# Altium PCB MC0202_V0.90.pcbdoc (part 1 of 3)
Units mm, origin at the board's own origin, x right, y up, seen from the top; angles counter-clockwise.
Board outline 121 x 80 mm, 4 copper layers (Top Layer, Mid-Layer 1, Mid-Layer 2, Bottom Layer); 203 components, 207 nets, 836 pads, 317 vias.
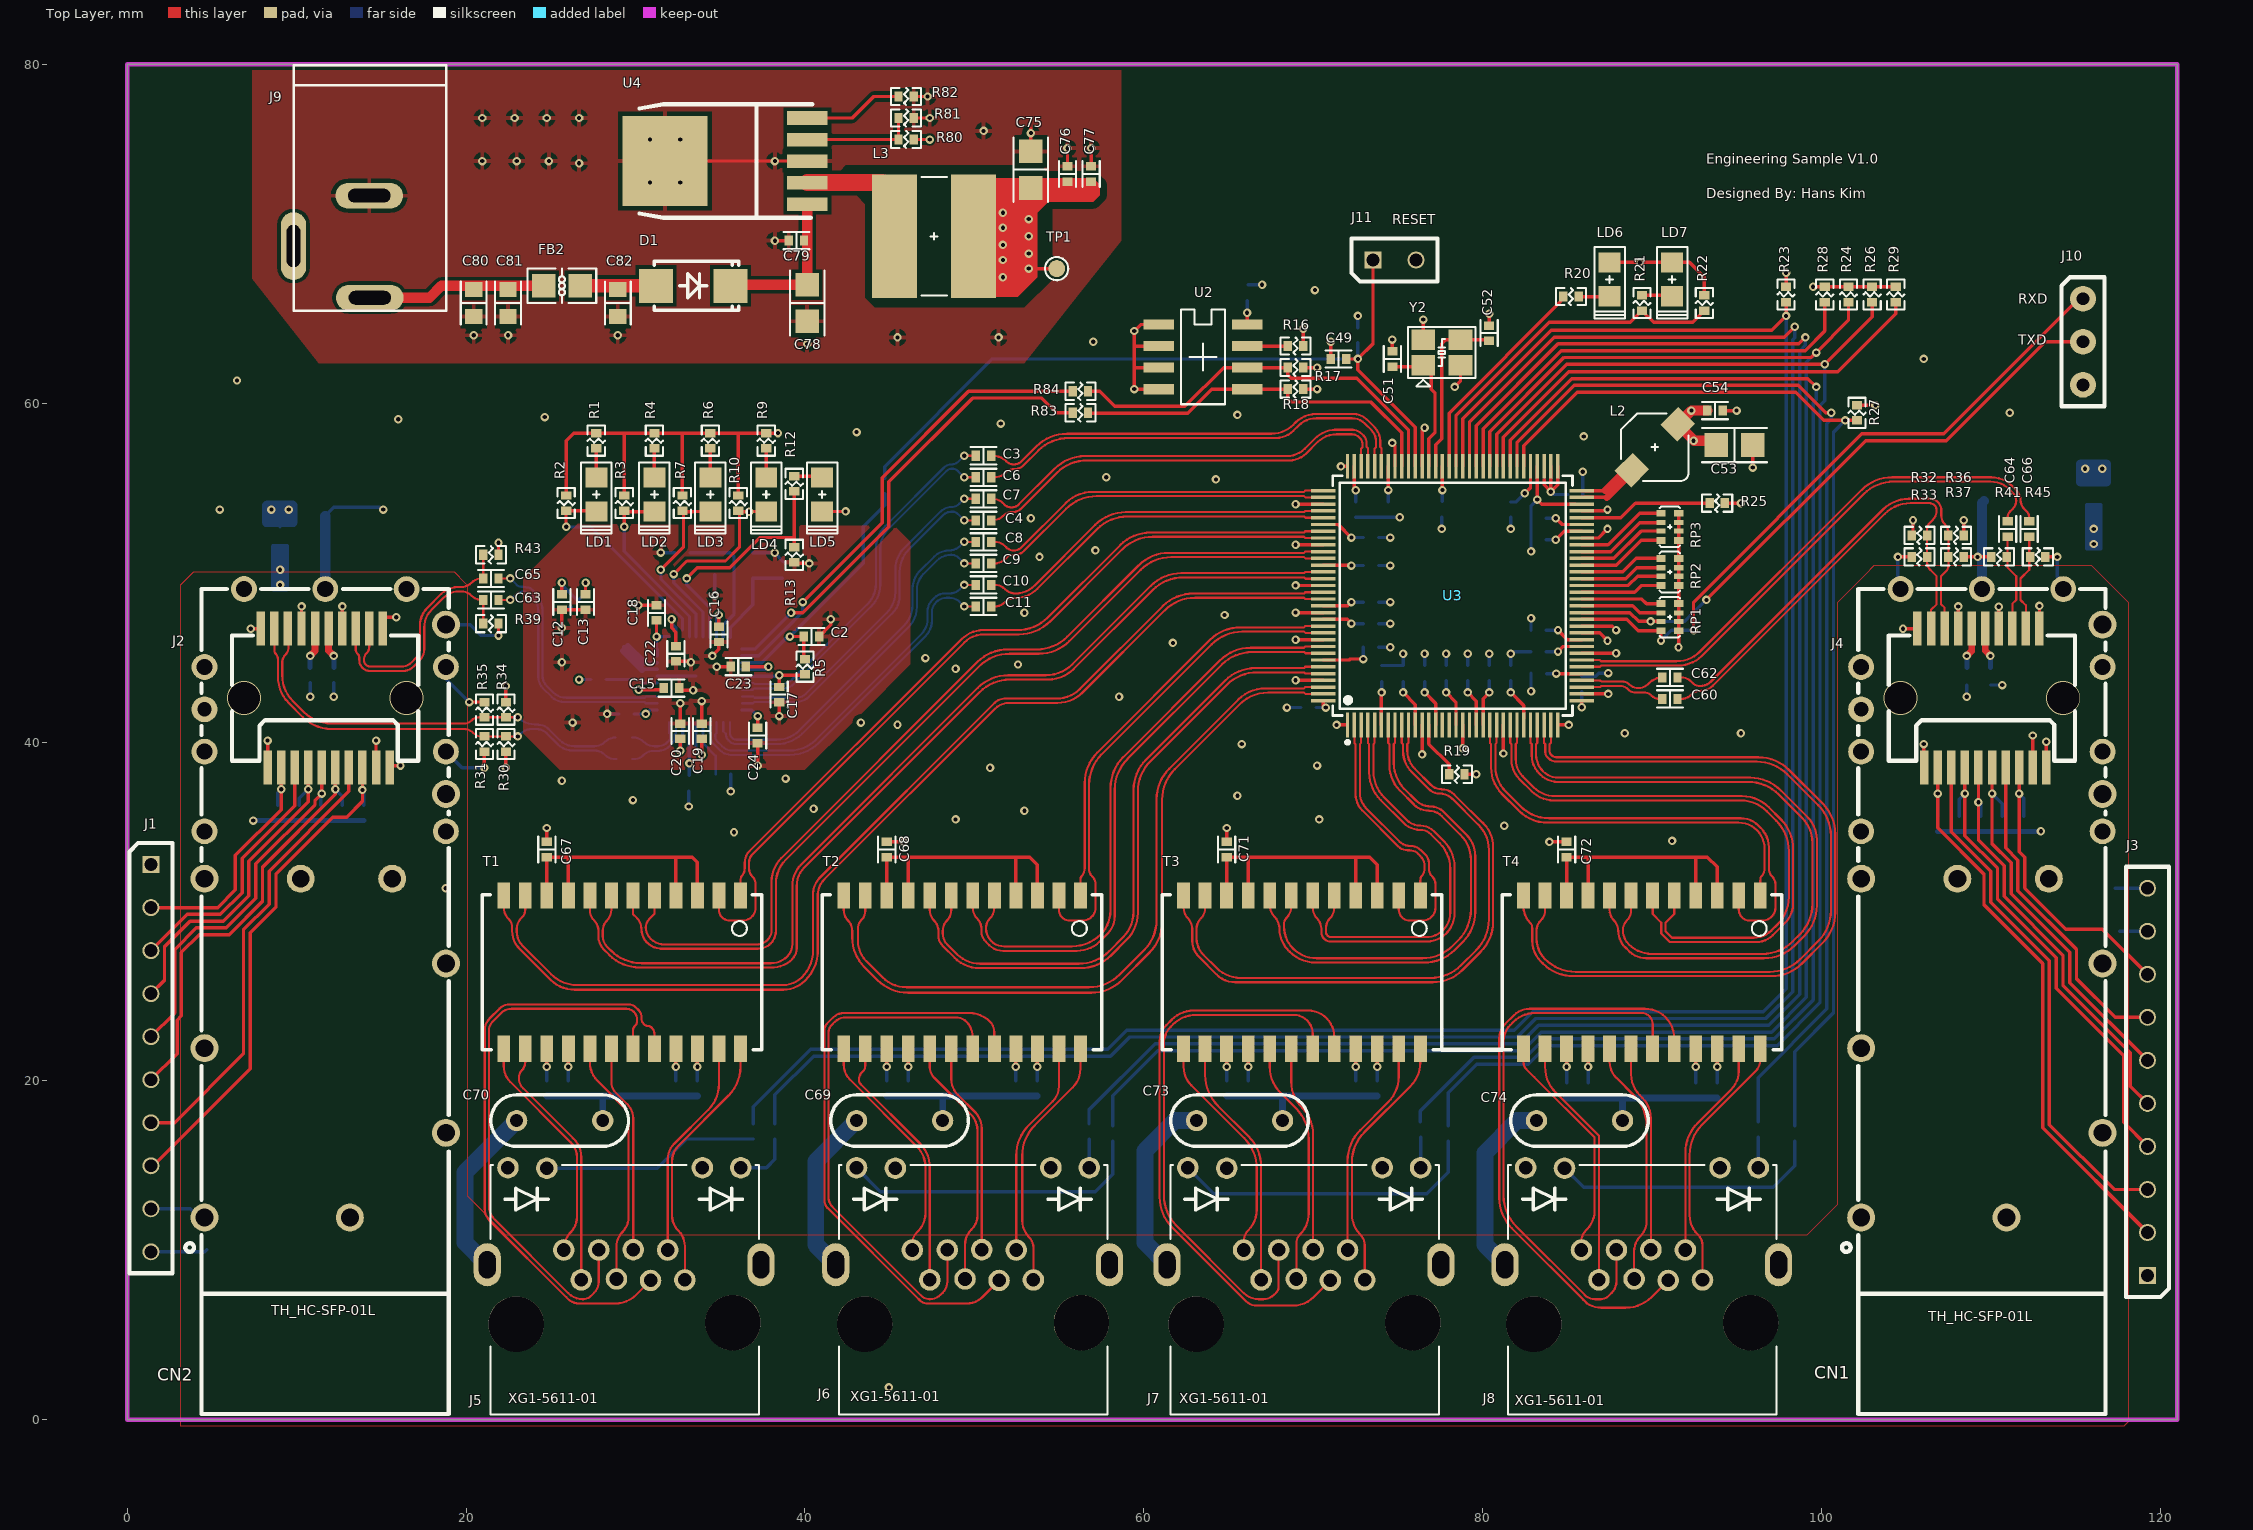
[diagram p0: Top Layer view]
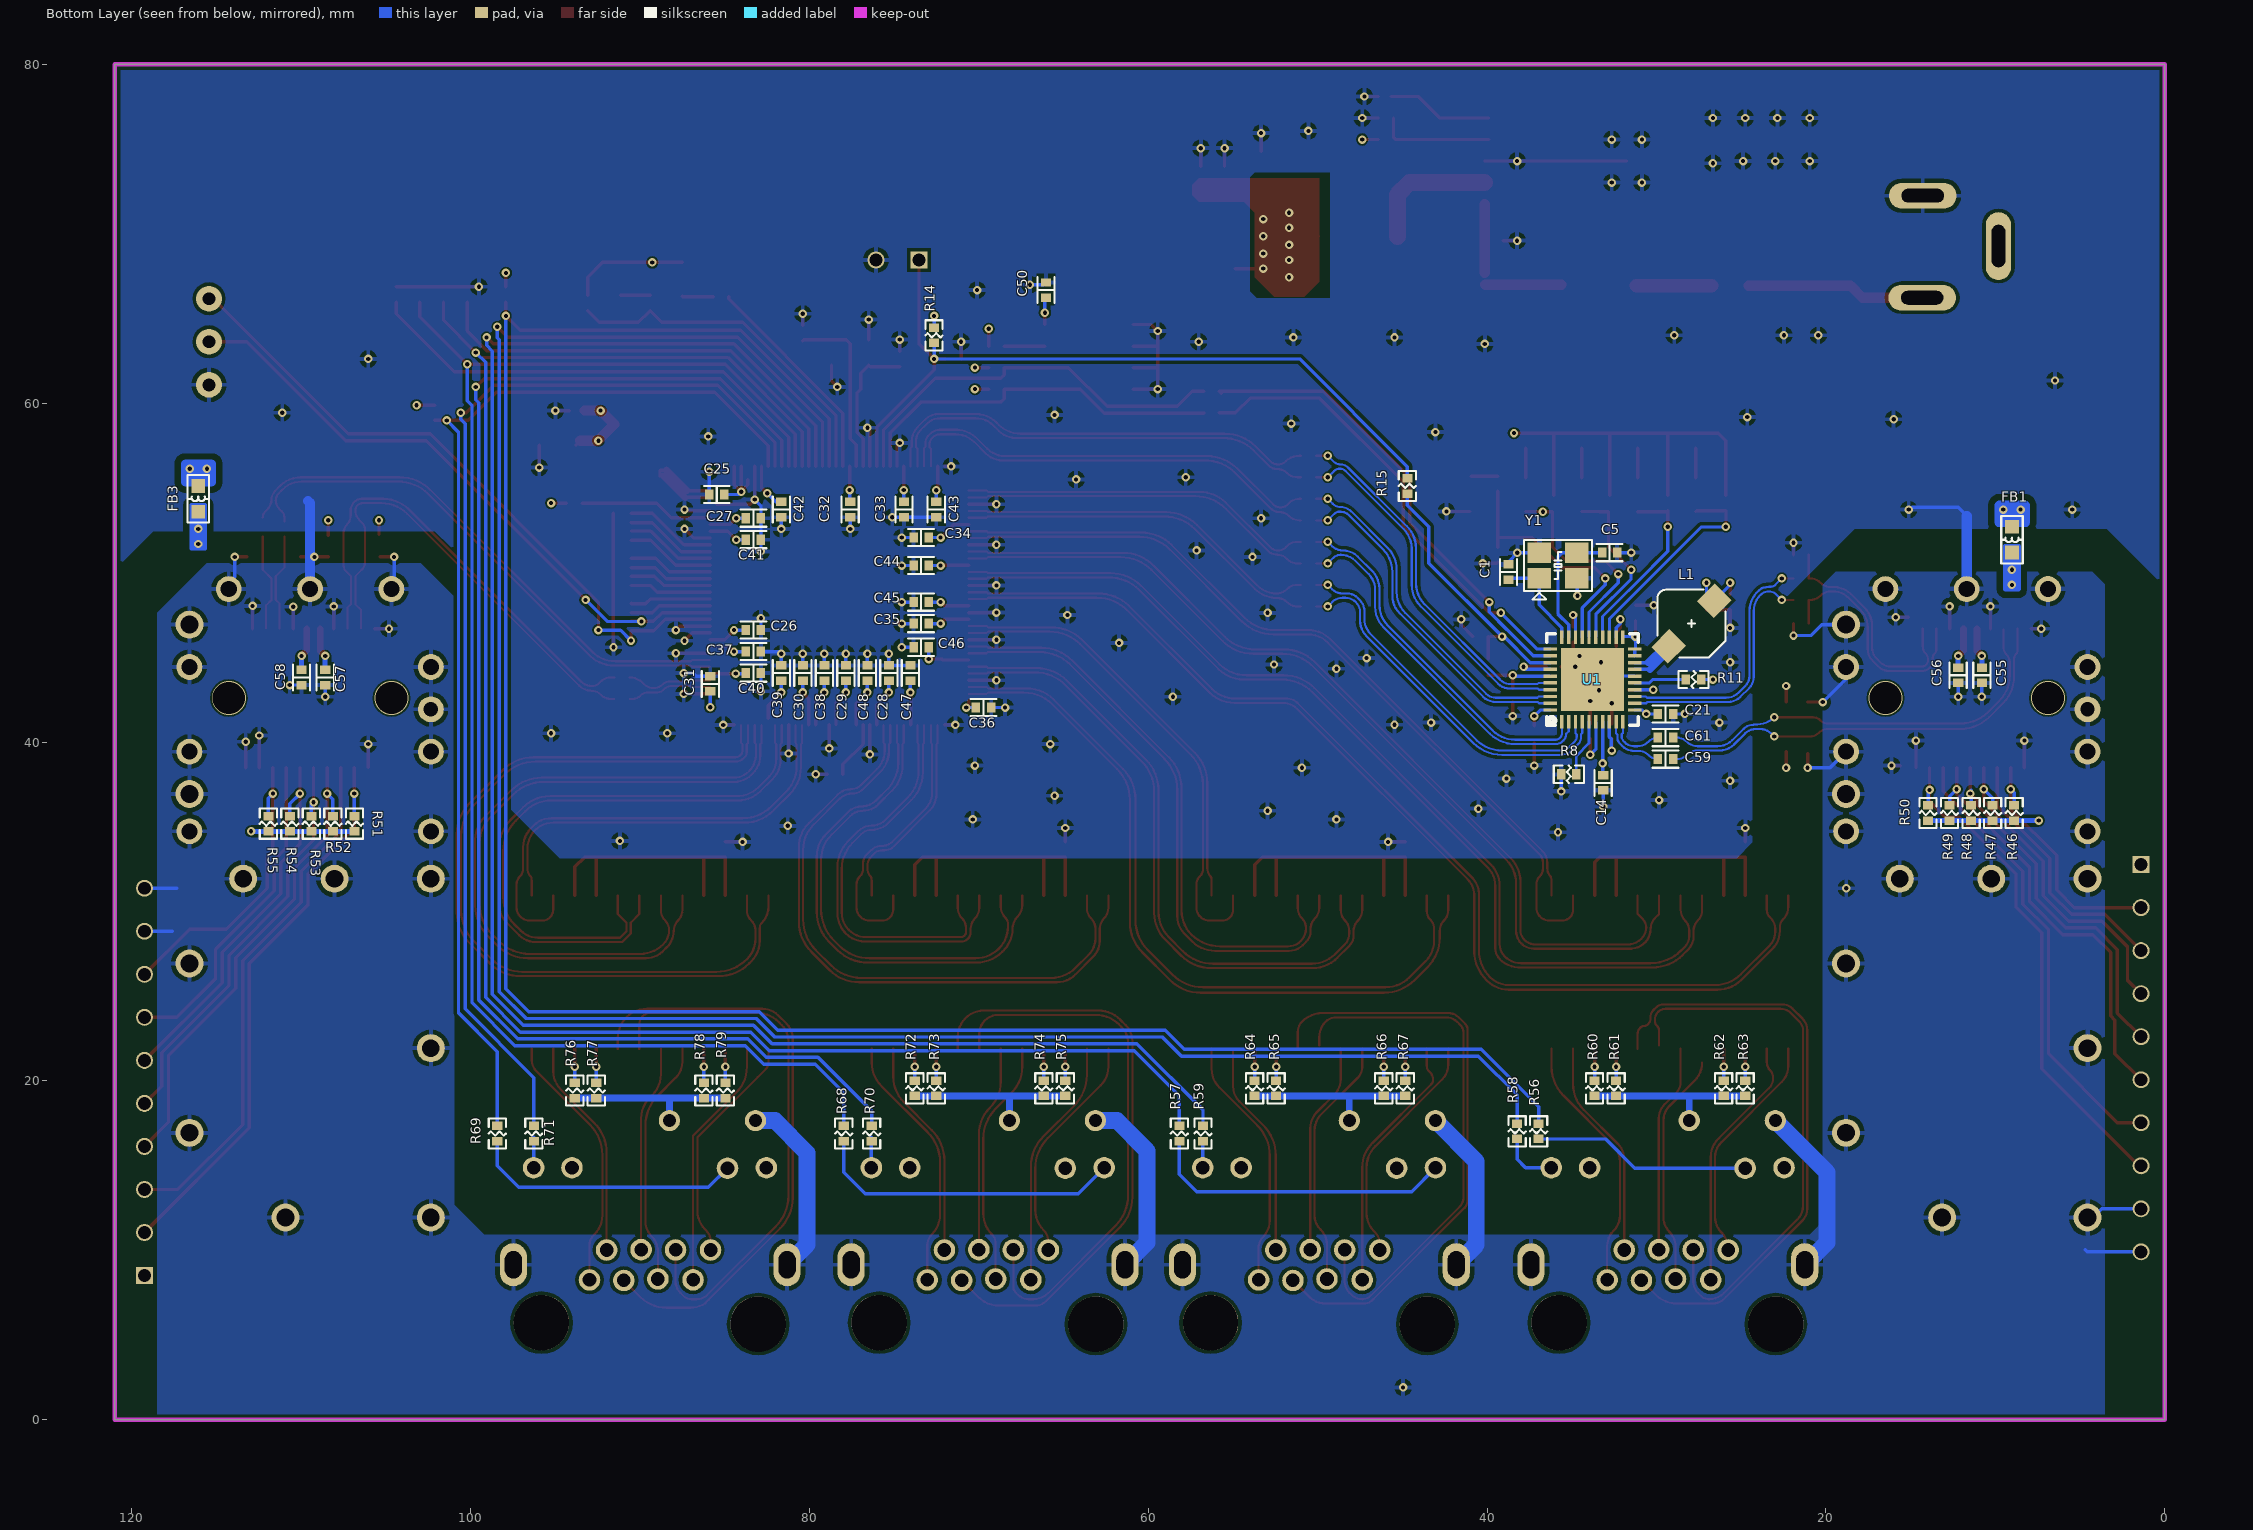
[diagram p1: Bottom Layer view, seen from below]
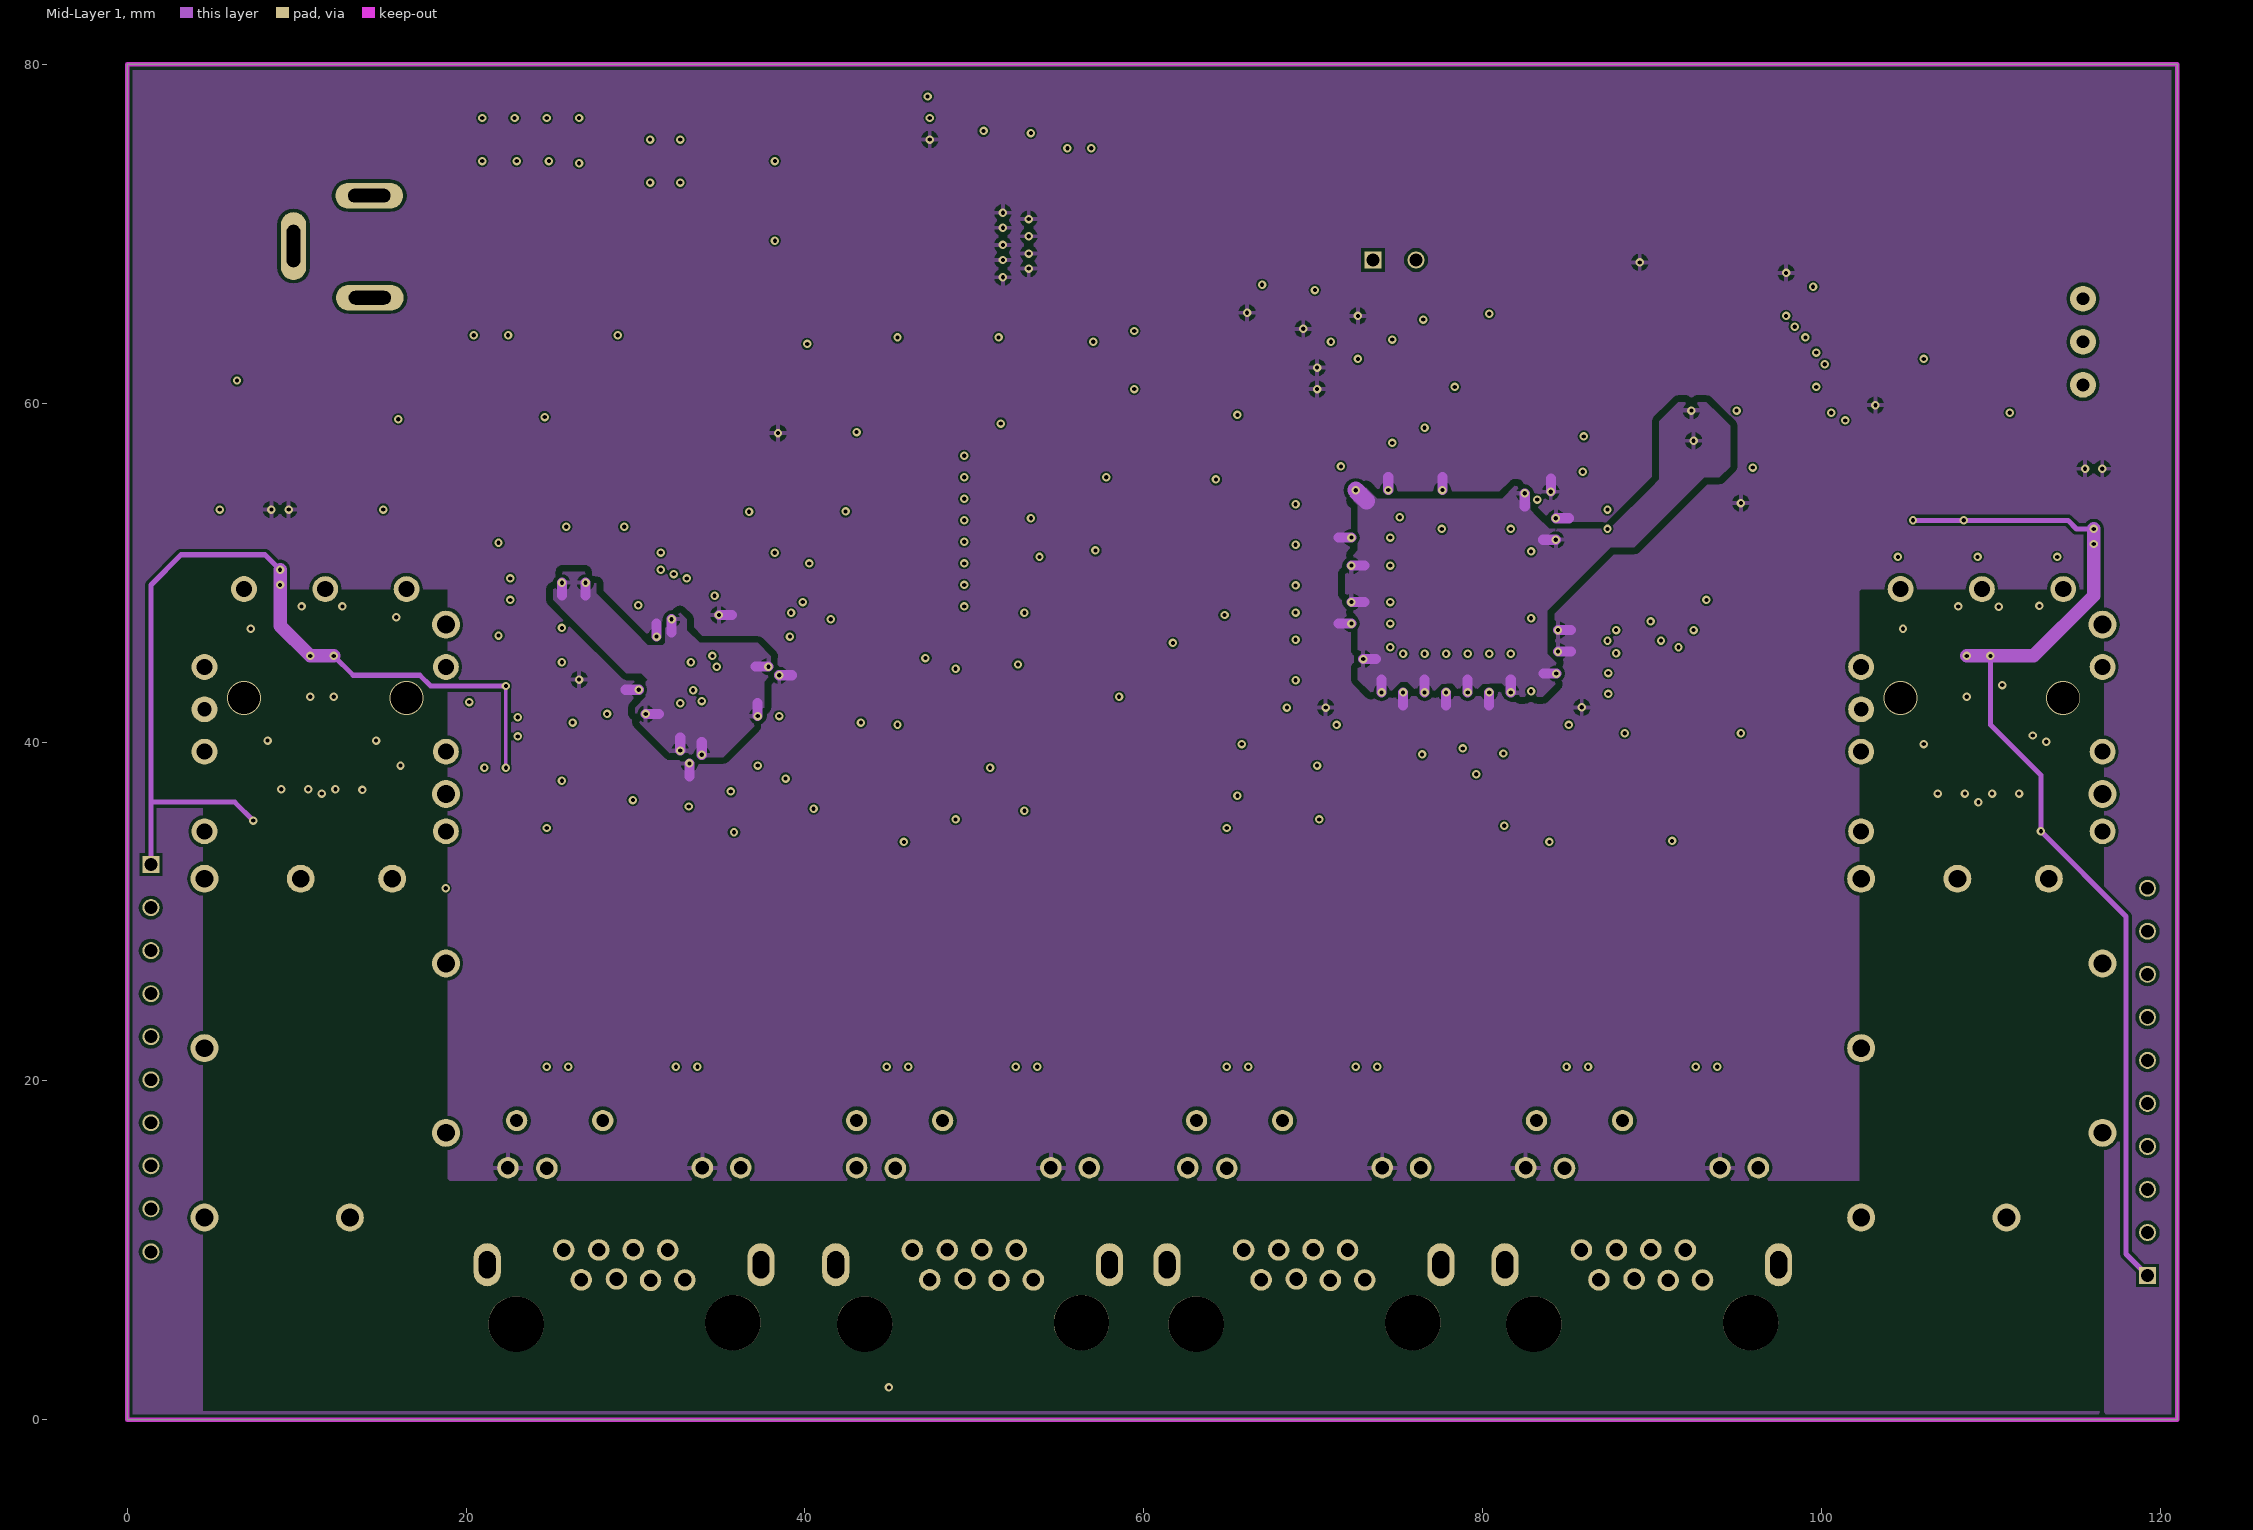
[diagram p2: Mid-Layer 1]
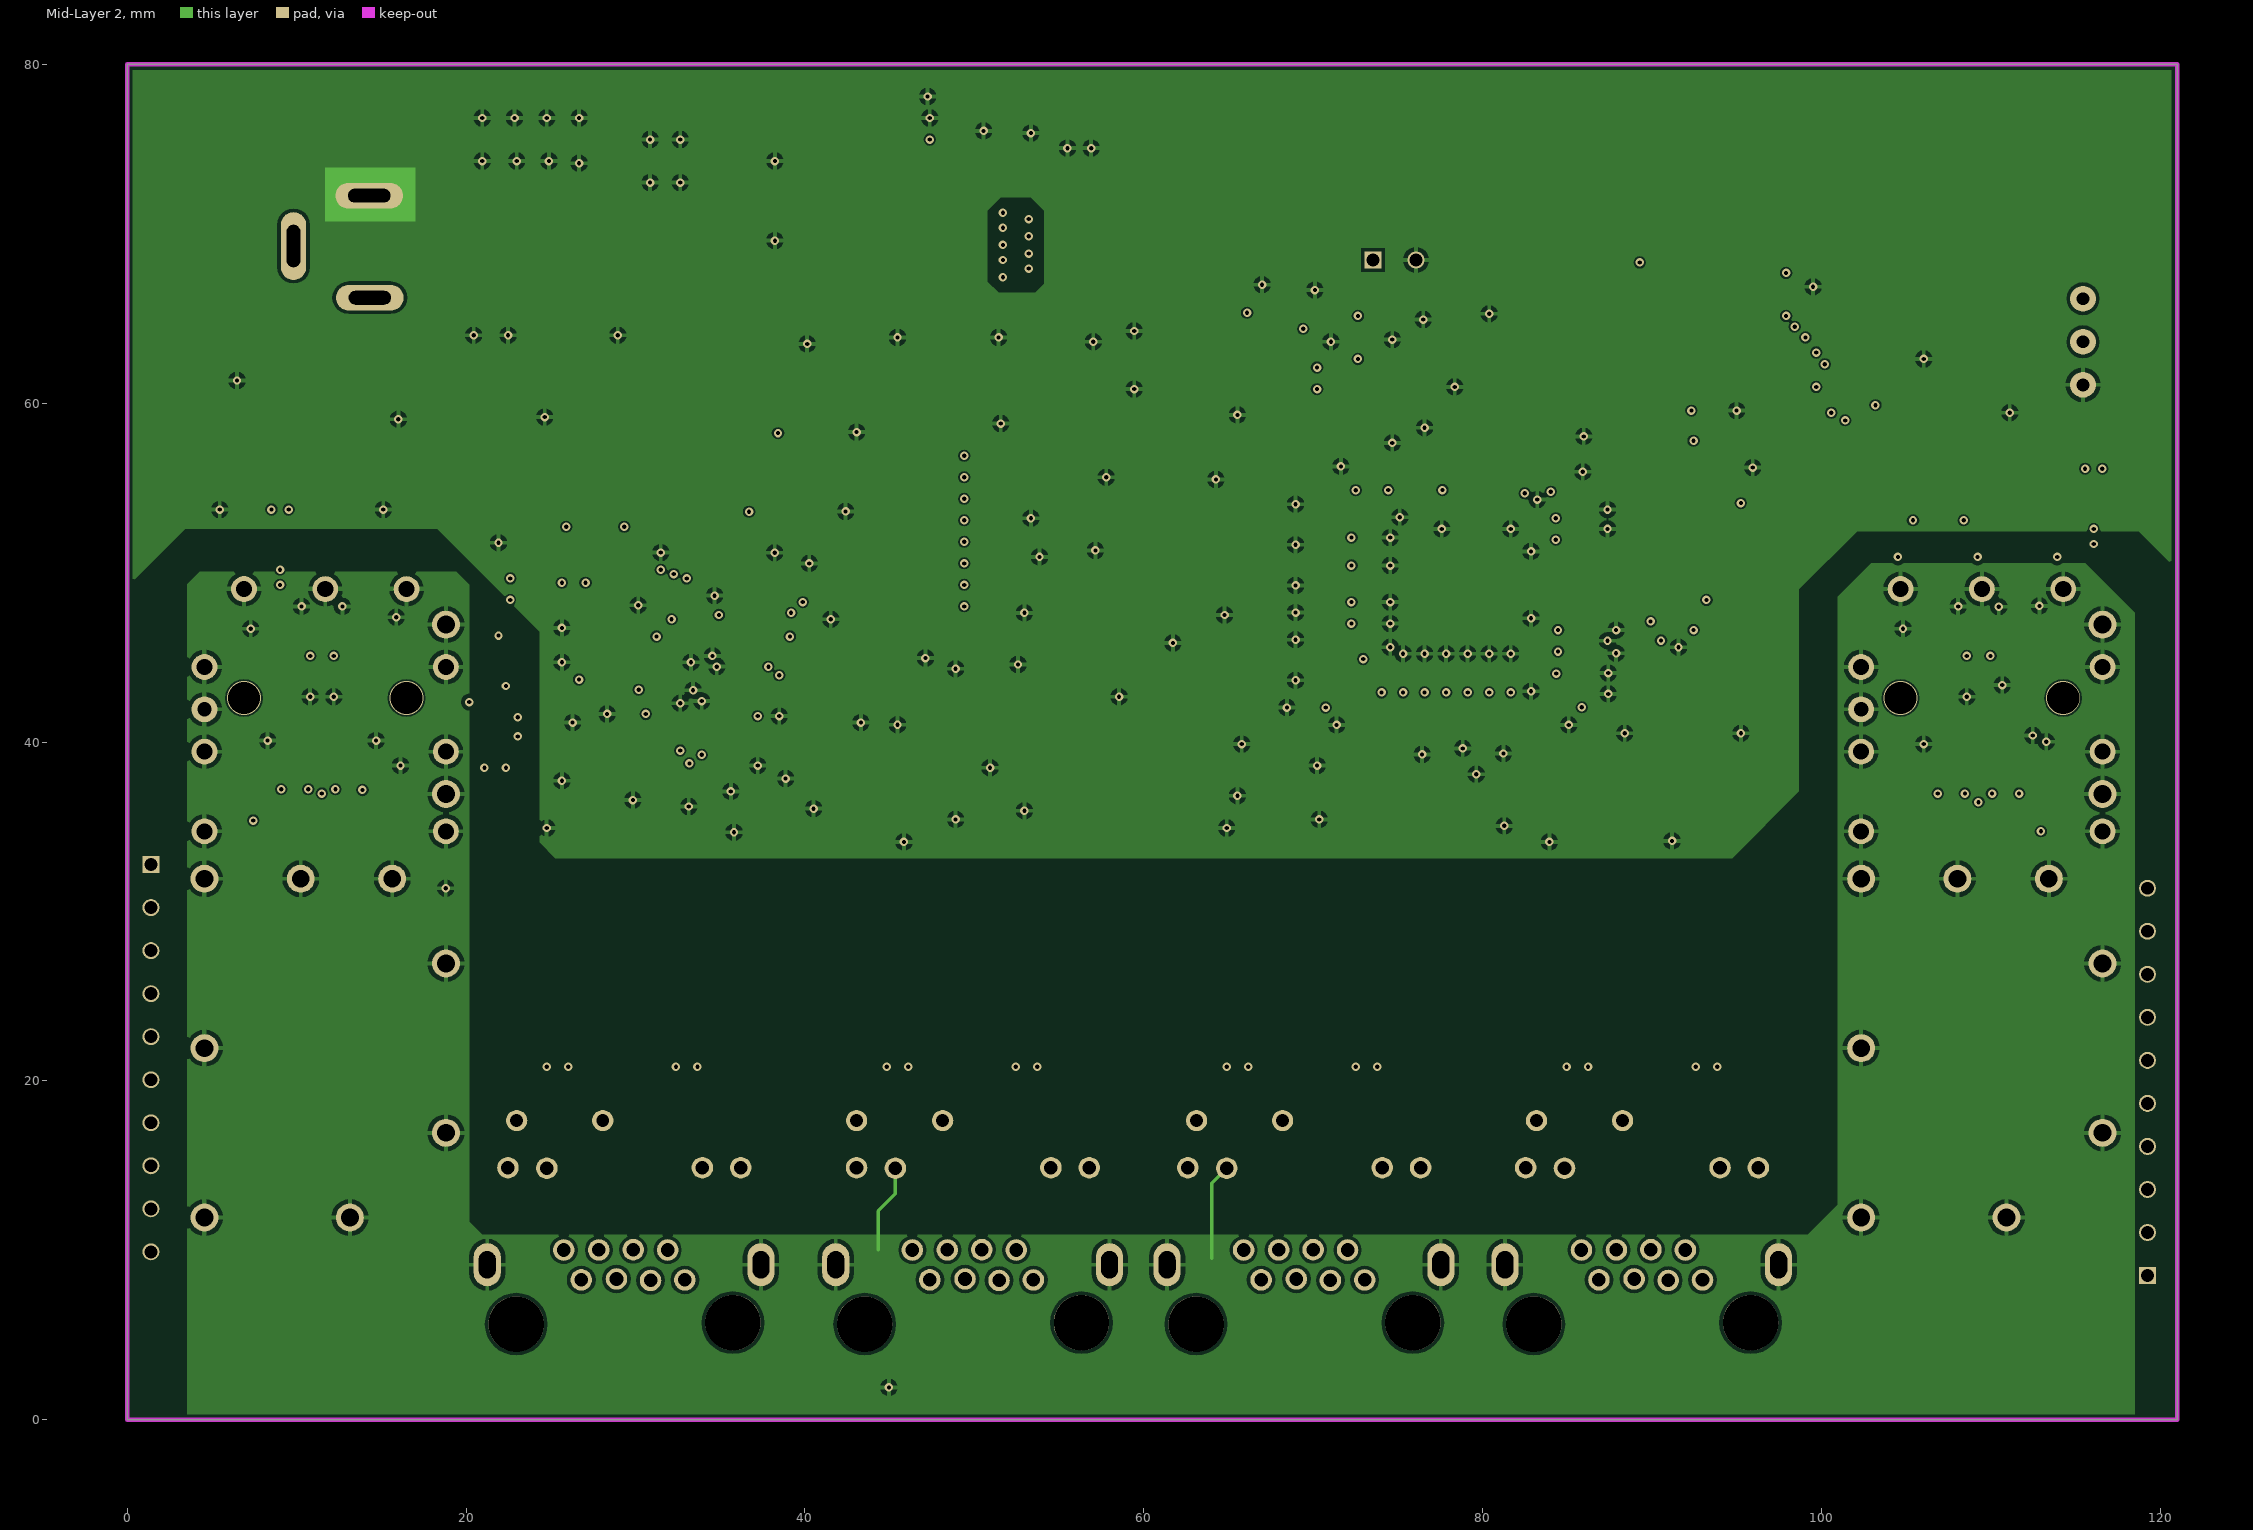
[diagram p3: Mid-Layer 2]

## Layer stack, top to bottom
Top Solder: solder mask 0.0102, Solder Resist, Dk 3.5
Top Layer: signal copper 0.0356
Dielectric1: dielectric 0.32, FR-4, Dk 4.8
Mid-Layer 1: signal copper 0.0356
Dielectric2: dielectric 0.32, FR-4, Dk 4.8
Mid-Layer 2: signal copper 0.0356
Dielectric3: dielectric 0.32, FR-4, Dk 4.8
Bottom Layer: signal copper 0.0356
Bottom Solder: solder mask 0.0102, Solder Resist, Dk 3.5

## Board outline
0,0 121,0 121,80 0,80

## Design rules (kind name [scope] priority, off if disabled: settings)
Clearance Clearance_4 [isRegion vs IsRegion] p1: gap=0.4 ignorepadtopadclearanceinfootprint=FALSE except(0: Arc-Hole Track-Hole SMDPad-Hole THPad-Hole Via-Hole Fill-Hole Poly-Hole Region-Hole Text-Hole)
Clearance Clearance_3 [HasFootprint('QFN-40_5X5') or HasFootprint('RP-4_1005') vs HasFootprint('QFN-40_5X5') or HasFootprint('RP-4_1005')] p2: gap=0.1 ignorepadtopadclearanceinfootprint=FALSE except(0: Arc-Hole Track-Hole SMDPad-Hole THPad-Hole Via-Hole Fill-Hole Poly-Hole Region-Hole Text-Hole)
Clearance Clearance_2 [InNetClass('ETH') vs InNetClass('ETH')] p3: gap=0.127 ignorepadtopadclearanceinfootprint=FALSE except(0: Arc-Hole Track-Hole SMDPad-Hole THPad-Hole Via-Hole Fill-Hole Poly-Hole Region-Hole Text-Hole)
Clearance Clearance_1 [isVia] p4: gap=0.1 ignorepadtopadclearanceinfootprint=FALSE except(0: Arc-Hole Track-Hole SMDPad-Hole THPad-Hole Via-Hole Fill-Hole Poly-Hole Region-Hole Text-Hole)
Clearance [All] p5: gap=0.2 ignorepadtopadclearanceinfootprint=FALSE except(0: Arc-Hole Track-Hole SMDPad-Hole THPad-Hole Via-Hole Fill-Hole Poly-Hole Region-Hole Text-Hole)
ComponentClearance ComponentClearance_1 [InComponent('CN1') or InComponent('CN2') vs InComponent('J2') or InComponent('J4')] p1: gap=0 collisioncheckmode=3 verticalgap=0 showdistances=FALSE
ComponentClearance [All] p2: gap=0.1 collisioncheckmode=3 verticalgap=0.1 showdistances=FALSE
HoleSize [All] p1: absolutevalues=TRUE maxlimit=5.12 minlimit=0.025 maxpercent=80.000 minpercent=20.000
MinimumSolderMaskSliver MinimumSolderMaskSliver_2 [isVia vs isVia] p1: minsoldermaskwidth=0.1
MinimumSolderMaskSliver MinimumSolderMaskSliver_1 [IsPad vs isPad] p2: minsoldermaskwidth=0.05
MinimumSolderMaskSliver [All] p3: minsoldermaskwidth=0.1
PolygonConnect [All] p1: connectstyle=Relief reliefconductorwidth=0.254 reliefentries=4 polygonreliefangle="90 Angle" airgapwidth=0.254
RoutingVias [All] p1: holewidth=0.25 width=0.5 viastyle="Through Hole" minholewidth=0.25 minwidth=0.5 maxholewidth=0.25 maxwidth=0.5
SilkToSilkClearance [All] p1: silktosilkclearance=0.01
SilkToSolderMaskClearance [IsPad] p1: minsilkscreentomaskgap=0 clearancetoexposedcopper=TRUE
SolderMaskExpansion [All] p1: expansion=0.102
Width Width_1 [InNetClass('ETH')] p1: maxlimit=0.127 minlimit=0.127 preferedwidth=0.127
Width [All] p2: maxlimit=1 minlimit=0.127 preferedwidth=0.2
25 further rules are at their usual default settings.

## Classes and differential pairs
net class ETH: P0_AN P0_AP P0_BN P0_BP P0_CN P0_CP P0_DN P0_DP P0_HSIN P0_HSIP P0_HSON P0_HSOP P0_MDI_AN P0_MDI_AP P0_MDI_BN P0_MDI_BP P0_MDI_CN P0_MDI_CP P0_MDI_DN P0_MDI_DP P1_ETH_AN P1_ETH_AP P1_ETH_BN P1_ETH_BP P1_ETH_CN P1_ETH_CP P1_ETH_DN P1_ETH_DP P2_ETH_AN P2_ETH_AP P2_ETH_BN P2_ETH_BP P2_ETH_CN P2_ETH_CP P2_ETH_DN P2_ETH_DP P3_ETH_AN P3_ETH_AP P3_ETH_BN P3_ETH_BP P3_ETH_CN P3_ETH_CP P3_ETH_DN P3_ETH_DP P4_ETH_AN P4_ETH_AP P4_ETH_BN P4_ETH_BP P4_ETH_CN P4_ETH_CP P4_ETH_DN P4_ETH_DP P5_HSIN P5_HSIP P5_HSON P5_HSOP RJ1_AN RJ1_AP RJ1_BN RJ1_BP RJ1_CN RJ1_CP RJ1_DN RJ1_DP RJ2_AN RJ2_AP RJ2_BN RJ2_BP RJ2_CN RJ2_CP RJ2_DN RJ2_DP RJ3_AN RJ3_AP RJ3_BN RJ3_BP RJ3_CN RJ3_CP RJ3_DN RJ3_DP RJ4_AN RJ4_AP RJ4_BN RJ4_BP RJ4_CN RJ4_CP RJ4_DN RJ4_DP SFP0_RXN SFP0_RXP SFP0_TXN SFP0_TXP SFP5_RXN SFP5_RXP SFP5_TXN SFP5_TXP

## Components (designator, comment, footprint, x,y, rotation, side; value= is the part's Value field where it differs from the comment)
C1 "12pF" CS-1005 38.735,50.038 r90 bottom
C2 "0.1uF" CS-1005 40.386,46.228 r0 top
C3 "0.1uF" CS-1005 50.546,56.896 r0 top
C4 "0.1uF" CS-1005 50.546,53.086 r0 top
C5 "12pF" CS-1005 32.766,51.181 r180 bottom
C6 "0.1uF" CS-1005 50.546,55.626 r0 top
C7 "0.1uF" CS-1005 50.546,54.356 r0 top
C8 "0.1uF" CS-1005 50.546,51.816 r0 top
C9 "0.1uF" CS-1005 50.546,50.546 r0 top
C10 "0.1uF" CS-1005 50.546,49.276 r0 top
C11 "0.1uF" CS-1005 50.546,48.006 r0 top
C12 "1uF" CS-1005 25.654,48.26 r270 top
C13 "0.1uF" CS-1005 27.051,48.26 r270 top
C14 "0.1uF" CS-1005 33.147,37.592 r270 bottom
C15 "0.1uF" CS-1005 32.131,43.18 r0 top
C16 "0.1uF" CS-1005 34.925,46.355 r270 top
C17 "0.1uF" CS-1005 38.481,42.799 r270 top
C18 "0.1uF" CS-1005 31.242,47.625 r90 top
C19 "0.1uF" CS-1005 33.909,40.64 r90 top
C20 "0.1uF" CS-1005 32.639,40.64 r90 top
C21 "0.1uF" CS-1005 29.464,41.656 r180 bottom
C22 "0.1uF" CS-1005 32.385,45.212 r270 top
C23 "0.1uF" CS-1005 36.068,44.45 r180 top
C24 "0.1uF" CS-1005 37.211,40.386 r270 top
C25 "0.1uF" CS-1005 85.471,54.61 r0 bottom
C26 "0.1uF" CS-1005 83.312,46.609 r180 bottom
C27 "0.1uF" CS-1005 83.312,53.213 r180 bottom
C28 "0.1uF" CS-1005 75.311,44.069 r90 bottom
C29 "0.1uF" CS-1005 77.851,44.069 r90 bottom
C30 "0.1uF" CS-1005 80.391,44.069 r90 bottom
C31 "0.1uF" CS-1005 85.852,43.434 r90 bottom
C32 "0.1uF" CS-1005 77.597,53.721 r270 bottom
C33 "0.1uF" CS-1005 74.422,53.721 r270 bottom
C34 "0.1uF" CS-1005 73.406,52.07 r0 bottom
C35 "0.1uF" CS-1005 73.406,46.99 r0 bottom
C36 "0.1uF" CS-1005 69.723,42.037 r180 bottom
C37 "0.1uF" CS-1005 83.312,45.339 r180 bottom
C38 "0.1uF" CS-1005 79.121,44.069 r90 bottom
C39 "0.1uF" CS-1005 81.661,44.069 r90 bottom
C40 "0.1uF" CS-1005 83.312,44.069 r180 bottom
C41 "0.1uF" CS-1005 83.312,51.943 r180 bottom
C42 "0.1uF" CS-1005 81.661,53.721 r270 bottom
C43 "0.1uF" CS-1005 72.517,53.721 r270 bottom
C44 "0.1uF" CS-1005 73.406,50.419 r0 bottom
C45 "0.1uF" CS-1005 73.406,48.26 r0 bottom
C46 "0.1uF" CS-1005 73.406,45.593 r0 bottom
C47 "0.1uF" CS-1005 74.041,44.069 r90 bottom
C48 "0.1uF" CS-1005 76.581,44.069 r90 bottom
C49 "0.1uF" CS-1005 71.501,62.611 r180 top
C50 "0.1uF" CS-1005 66.04,66.675 r90 bottom
C51 "12pF" CS-1005 74.676,62.611 r90 top
C52 "12pF" CS-1005 80.391,64.135 r90 top
C53 "10uF" CS-2012 94.869,57.531 r0 top
C54 "0.1uF" CS-1005 93.726,59.563 r0 top
C55 "0.1uF" CS-1005 10.795,43.942 r90 bottom
C56 "1uF" CS-1005 12.192,43.942 r90 bottom
C57 "0.1uF" CS-1005 108.585,43.815 r90 bottom
C58 "1uF" CS-1005 109.982,43.815 r90 bottom
C59 "0.1uF" CS-1005 29.464,38.989 r0 bottom
C60 "0.1uF" CS-1005 91.059,42.545 r180 top
C61 "0.1uF" CS-1005 29.464,40.259 r0 bottom
C62 "0.1uF" CS-1005 91.059,43.815 r180 top
C63 "0.1uF" CS-1005 21.463,48.387 r0 top
C64 "0.1uF" CS-1005 110.998,52.578 r90 top
C65 "0.1uF" CS-1005 21.463,49.657 r0 top
C66 "0.1uF" CS-1005 112.268,52.578 r90 top
C67 "10nF" CS-1005 24.765,33.655 r90 top
C68 "10nF" CS-1005 44.831,33.655 r90 top
C69 "1nF/2KV" CIP-5.0 45.593,17.653 r180 top
C70 "1nF/2KV" CIP-5.0 25.527,17.653 r180 top
C71 "10nF" CS-1005 64.897,33.655 r90 top
C72 "10nF" CS-1005 84.963,33.655 r90 top
C73 "1nF/2KV" CIP-5.0 65.659,17.653 r180 top
C74 "1nF/2KV" CIP-5.0 85.725,17.653 r180 top
C75 "10uF" CS-2012 53.34,73.787 r90 top
C76 "0.1uF" CS-1005 55.499,73.533 r90 top
C77 "10nF" CS-1005 56.896,73.533 r90 top
C78 "10uF" CS-2012 40.132,65.913 r270 top
C79 "0.1uF" CS-1005 39.497,69.596 r180 top
C80 "0.1uF" CS-1608 20.447,65.913 r270 top
C81 "1nF" CS-1608 22.479,65.913 r270 top
C82 "0.1uF" CS-1608 28.956,65.913 r270 top
CN1 "TH_HC-SFP-01L" TH_HC-SFP-01L 109.474,30.48 r0 top
CN2 "TH_HC-SFP-01L" TH_HC-SFP-01L 11.684,30.48 r0 top
D1 "RB051L-40" SOD-106 33.401,66.929 r0 top
FB1 "600" LS-1608 9.017,51.943 r270 bottom
FB2 "60" LS-2012 25.654,66.929 r0 top
FB3 "600" LS-1608 116.078,54.356 r270 bottom
J1 "CON 10P" Header_2.54_10p 1.397,32.766 r270 top
J2 "KSP20LG154" KSP20LG154 11.684,42.592 r0 top
J3 "CON 10P" Header_2.54_10p 119.253,8.509 r90 top
J4 "KSP20LG154" KSP20LG154 109.474,42.592 r0 top
J5 "XG1-5611-01" XG1-5611-01 29.464,5.588 r180 top
J6 "XG1-5611-01" XG1-5611-01 50.038,5.588 r180 top
J7 "XG1-5611-01" XG1-5611-01 69.596,5.588 r180 top
J8 "XG1-5611-01" XG1-5611-01 89.535,5.588 r180 top
J9 "DC005" DC005 14.224,69.469 r0 top
J10 "CON 3P" Header_2.54_3p 115.443,63.627 r270 top
J11 "CON 2P" Header_2.54_2p 73.533,68.453 r0 top
L1 "2.2uH" CDRH3D16NP 27.94,46.99 r180 bottom
L2 "2.2uH" CDRH3D16NP 90.17,57.404 r180 top
L3 "100uH" CDRH6D38NP 47.625,69.85 r90 top
LD1 "LED" LED2012 27.686,54.61 r90 top
LD2 "LED" LED2012 31.115,54.61 r90 top
LD3 "LED" LED2012 34.417,54.61 r90 top
LD4 "LED" LED2012 37.719,54.61 r90 top
LD5 "LED" LED2012 41.021,54.61 r90 top
LD6 "LED" LED2012 87.503,67.31 r90 top
LD7 "LED" LED2012 91.186,67.31 r90 top
R1 "470" RS-1005 27.686,57.785 r270 top
R2 "4.7K" RS-1005 25.908,54.102 r270 top
R3 "4.7k" RS-1005 29.337,54.102 r270 top
R4 "470" RS-1005 31.115,57.785 r270 top
R5 "4.7K" RS-1005 40.005,44.45 r90 top
R6 "4.7k" RS-1005 34.417,57.785 r270 top
R7 "4.7K" RS-1005 32.766,54.102 r270 top
R8 "2.5K_F" RS-1005 35.179,38.1 r180 bottom
R9 "4.7K" RS-1005 37.719,57.785 r270 top
R10 "4.7K" RS-1005 36.068,54.102 r270 top
R11 "4.7K" RS-1005 27.813,43.688 r0 bottom
R12 "470" RS-1005 39.37,55.245 r90 top
R13 "4.7K" RS-1005 39.37,51.054 r270 top
R14 "100K" RS-1005 72.644,64.008 r270 bottom
R15 "0//NI" RS-1005 44.704,55.118 r90 bottom
R16 "1.5K" RS-1005 68.961,63.373 r180 top
R17 "1.5K" RS-1005 68.961,62.103 r180 top
R18 "1.5K" RS-1005 68.961,60.833 r180 top
R19 "2.49K_F" RS-1005 78.486,38.1 r0 top
R20 "470" RS-1005 85.217,66.294 r180 top
R21 "470" RS-1005 89.408,65.913 r270 top
R22 "4.7K" RS-1005 93.091,65.913 r90 top
R23 "4.7K" RS-1005 97.917,66.421 r90 top
R24 "4.7K" RS-1005 101.6,66.421 r90 top
R25 "4.7K" RS-1005 93.853,54.102 r0 top
R26 "4.7K" RS-1005 102.997,66.421 r90 top
R27 "4.7K" RS-1005 102.108,59.436 r90 top
R28 "4.7K" RS-1005 100.203,66.421 r90 top
R29 "4.7K" RS-1005 104.394,66.421 r90 top
R30 "10K" RS-1005 22.352,39.878 r270 top
R31 "10K" RS-1005 21.082,39.878 r90 top
R32 "10K" RS-1005 105.791,52.197 r180 top
R33 "10K" RS-1005 105.791,50.927 r0 top
R34 "10K" RS-1005 22.352,41.91 r90 top
R35 "10K" RS-1005 21.082,41.91 r270 top
R36 "10K" RS-1005 107.95,52.197 r0 top
R37 "10K" RS-1005 107.95,50.927 r180 top
R39 "10K" RS-1005 21.463,46.99 r180 top
R41 "10K" RS-1005 110.49,50.927 r0 top
R43 "10K" RS-1005 21.463,51.054 r180 top
R45 "10K" RS-1005 112.776,50.927 r180 top
R46 "10K" RS-1005 8.89,35.814 r270 bottom
R47 "10K" RS-1005 10.16,35.814 r270 bottom
R48 "10K" RS-1005 11.43,35.814 r270 bottom
R49 "10K" RS-1005 12.7,35.814 r270 bottom
R50 "10K" RS-1005 13.97,35.814 r270 bottom
R51 "10K" RS-1005 106.861,35.179 r270 bottom
R52 "10K" RS-1005 108.131,35.179 r270 bottom
R53 "10K" RS-1005 109.401,35.179 r270 bottom
R54 "10K" RS-1005 110.671,35.179 r270 bottom
R55 "10K" RS-1005 111.941,35.179 r270 bottom
R56 "470" RS-1005 36.957,17.018 r270 bottom
R57 "470" RS-1005 58.166,16.891 r270 bottom
R58 "470" RS-1005 38.227,17.018 r270 bottom
R59 "470" RS-1005 56.769,16.891 r270 bottom
R60 "75" RS-1005 33.655,19.558 r90 bottom
R61 "75" RS-1005 32.385,19.558 r90 bottom
R62 "75" RS-1005 26.035,19.558 r90 bottom
R63 "75" RS-1005 24.765,19.558 r90 bottom
R64 "75" RS-1005 53.721,19.558 r90 bottom
R65 "75" RS-1005 52.451,19.558 r90 bottom
R66 "75" RS-1005 46.101,19.558 r90 bottom
R67 "75" RS-1005 44.831,19.558 r90 bottom
R68 "470" RS-1005 77.978,16.891 r270 bottom
R69 "470" RS-1005 98.425,16.891 r270 bottom
R70 "470" RS-1005 76.327,16.891 r270 bottom
R71 "470" RS-1005 96.266,16.891 r270 bottom
R72 "75" RS-1005 73.787,19.558 r90 bottom
R73 "75" RS-1005 72.517,19.558 r90 bottom
R74 "75" RS-1005 66.167,19.558 r90 bottom
R75 "75" RS-1005 64.897,19.558 r90 bottom
R76 "75" RS-1005 93.853,19.431 r90 bottom
R77 "75" RS-1005 92.583,19.431 r90 bottom
R78 "75" RS-1005 86.233,19.431 r90 bottom
R79 "75" RS-1005 84.963,19.431 r90 bottom
R80 "10K_1%" RS-1005 45.974,75.565 r0 top
R81 "6K_1%" RS-1005 45.974,76.835 r180 top
R82 "0" RS-1005 45.974,78.105 r180 top
R83 "0//NI" RS-1005 56.261,59.436 r0 top
R84 "0//NI" RS-1005 56.261,60.706 r0 top
RP1 "1K" RP-4_1005 91.059,47.371 r90 top
RP2 "1K" RP-4_1005 91.059,50.038 r90 top
RP3 "1K" RP-4_1005 91.059,52.705 r90 top
T1 "HY2424S-LF" HY2424S-LF 29.21,26.416 r180 top
T2 "HY2424S-LF" HY2424S-LF 49.276,26.416 r180 top
T3 "HY2424S-LF" HY2424S-LF 69.342,26.416 r180 top
T4 "HY2424S-LF" HY2424S-LF 89.408,26.416 r180 top
TP1 "3.3V" TP-SMD(1.0) 54.864,67.945 r90 top
U1 "RTL8213B" QFN-40_5X5 33.782,43.688 r180 bottom
U2 "24C64" SOP8_W5.0X6.0_P1.27_F0.8 63.5,62.738 r90 top
U3 "RTL8367S" LQFP-128 78.232,48.641 r0 top
U4 "XL7015E1" TO252-5L 35.941,74.295 r90 top
Y1 "25MHz-S20P-SX32" SX-32 35.814,50.419 r0 bottom
Y2 "25MHz-S20P-SX32" SX-32 77.597,62.992 r180 top

## Footprints (in the part's own frame and the unit in brackets; to place one, negate y for a bottom-side part, rotate by r counter-clockwise, add the part's x,y. Pads: shape width x height; smd on the part's side, far side on the other; paste and mask are expansions set on the pad)
CDRH3D16NP [mm]
  rect 1.5x1.4 smd rot 45: 1(1.35,1.35) 2(-1.35,-1.35)
  Top Layer pour cut-out: -1.973,1.727 -2,-0.7 -0.7,-2 1.025,-2 2,-1.025 2,0.7 0.7,2 -1.7,2
  silkscreen extent -2,-2 2,2
CDRH6D38NP [mm]
  rect 7.3x2.65 smd: 1(0,-2.325) 2(0,2.325)
  silkscreen extent -3.5,-0.75 3.5,0.75
CIP-5.0 [mil]
  round 49.37 hole 30: 1(-100,0) 2(100,0)
  silkscreen extent -160,-60 160,60
CS-1005 [mm]
  rect 0.5x0.6 smd: 1(-0.45,0) 2(0.45,0)
  silkscreen extent -0.76,-0.51 0.76,0.51
CS-1608 [mil]
  rect 35x40 smd: 1(-31.5,0) 2(31.5,0)
  silkscreen extent -50,-30 50,30
CS-2012 [mil]
  rect 55x55 smd: 1(-42.5,0) 2(42.5,0)
  silkscreen extent -75,-40 75,40
DC005 [mm]
  oval 4x1.5 hole 0.8 slot 2.5 at 0 deg: 1(0.059,2.779) 3(0.092,-3.243)
  oval 1.5x4 hole 0.8 slot 2.5 at 90 deg: 2(-4.41,-0.191)
  silkscreen extent -4.38,-4.01 4.62,10.49
Header_2.54_2p [mm]
  rect 1x1 hole 0.762: 1(0,0)
  round 1 hole 0.762: 2(2.54,0)
  silkscreen extent -1.27,-1.27 3.81,1.27
Header_2.54_3p [mil]
  round 60 hole 30: 1(-100,0) 2(0,0) 3(100,0)
  silkscreen extent -150,-50 150,50
Header_2.54_10p [mm]
  rect 1x1 hole 0.762: 1(0,0)
  round 1 hole 0.762: 2(2.54,0) 3(5.08,0) 4(7.62,0) 5(10.16,0) 6(12.7,0) 7(15.24,0) 8(17.78,0) 9(20.32,0) 10(22.86,0)
  silkscreen extent -1.27,-1.27 24.13,1.27
HY2424S-LF [mm]
  rect 0.76x1.56 smd: 1(-6.985,-4.525) 2(-5.715,-4.525) 3(-4.445,-4.525) 4(-3.175,-4.525) 5(-1.905,-4.525) 6(-0.635,-4.525) 7(0.635,-4.525) 8(1.905,-4.525) 9(3.175,-4.525) 10(4.445,-4.525) 11(5.715,-4.525) 12(6.985,-4.525) 13(6.985,4.525) 14(5.715,4.525) 15(4.445,4.525) 16(3.175,4.525) 17(1.905,4.525) 18(0.635,4.525) 19(-0.635,4.525) 20(-1.905,4.525) 21(-3.175,4.525) 22(-4.445,4.525) 23(-5.715,4.525) 24(-6.985,4.525)
  silkscreen extent -8.25,-4.58 8.25,4.58
KSP20LG154 [mm]
  rect 0.5x2 smd paste+0 mask+0.051: 1(-3.4,-4.1) 2(-2.6,-4.1) 3(-1.8,-4.1) 4(-1,-4.1) 5(-0.2,-4.1) 6(0.6,-4.1) 7(1.4,-4.1) 8(2.2,-4.1) 9(3,-4.1) 10(3.8,-4.1) 11(3.4,4.1) 12(2.6,4.1) 13(1.8,4.1) 14(1,4.1) 15(0.2,4.1) 16(-0.6,4.1) 17(-1.4,4.1) 18(-2.2,4.1) 19(-3,4.1) 20(-3.8,4.1)
  silkscreen extent -5.5,-3.7 5.5,3.7
LED2012 [mil]
  rect 47x51 smd: 1(39.37,0) 2(-39.37,0)
  silkscreen extent -91,-35 75,35
LQFP-128 [mm]
  rect 0.2x1.46 smd paste+0 mask+0.051: 1(-6.2,-7.63) 2(-5.8,-7.63) 3(-5.4,-7.63) 4(-5,-7.63) 5(-4.6,-7.63) 6(-4.2,-7.63) 7(-3.8,-7.63) 8(-3.4,-7.63) 9(-3,-7.63) 10(-2.6,-7.63) 11(-2.2,-7.63) 12(-1.8,-7.63) 13(-1.4,-7.63) 14(-1,-7.63) 15(-0.6,-7.63) 16(-0.2,-7.63) 17(0.2,-7.63) 18(0.6,-7.63) 19(1,-7.63) 20(1.4,-7.63) 21(1.8,-7.63) 22(2.2,-7.63) 23(2.6,-7.63) 24(3,-7.63) 25(3.4,-7.63) 26(3.8,-7.63) 27(4.2,-7.63) 28(4.6,-7.63) 29(5,-7.63) 30(5.4,-7.63) 31(5.8,-7.63) 32(6.2,-7.63) 65(6.2,7.63) 66(5.8,7.63) 67(5.4,7.63) 68(5,7.63) 69(4.6,7.63) 70(4.2,7.63) 71(3.8,7.63) 72(3.4,7.63) 73(3,7.63) 74(2.6,7.63) 75(2.2,7.63) 76(1.8,7.63) 77(1.4,7.63) 78(1,7.63) 79(0.6,7.63) 80(0.2,7.63) 81(-0.2,7.63) 82(-0.6,7.63) 83(-1,7.63) 84(-1.4,7.63) 85(-1.8,7.63) 86(-2.2,7.63) 87(-2.6,7.63) 88(-3,7.63) 89(-3.4,7.63) 90(-3.8,7.63) 91(-4.2,7.63) 92(-4.6,7.63) 93(-5,7.63) 94(-5.4,7.63) 95(-5.8,7.63) 96(-6.2,7.63)
  rect 1.46x0.2 smd paste+0 mask+0.051: 33(7.63,-6.2) 34(7.63,-5.8) 35(7.63,-5.4) 36(7.63,-5) 37(7.63,-4.6) 38(7.63,-4.2) 39(7.63,-3.8) 40(7.63,-3.4) 41(7.63,-3) 42(7.63,-2.6) 43(7.63,-2.2) 44(7.63,-1.8) 45(7.63,-1.4) 46(7.63,-1) 47(7.63,-0.6) 48(7.63,-0.2) 49(7.63,0.2) 50(7.63,0.6) 51(7.63,1) 52(7.63,1.4) 53(7.63,1.8) 54(7.63,2.2) 55(7.63,2.6) 56(7.63,3) 57(7.63,3.4) 58(7.63,3.8) 59(7.63,4.2) 60(7.63,4.6) 61(7.63,5) 62(7.63,5.4) 63(7.63,5.8) 64(7.63,6.2) 97(-7.63,6.2) 98(-7.63,5.8) 99(-7.63,5.4) 100(-7.63,5) 101(-7.63,4.6) 102(-7.63,4.2) 103(-7.63,3.8) 104(-7.63,3.4) 105(-7.63,3) 106(-7.63,2.6) 107(-7.63,2.2) 108(-7.63,1.8) 109(-7.63,1.4) 110(-7.63,1) 111(-7.63,0.6) 112(-7.63,0.2) 113(-7.63,-0.2) 114(-7.63,-0.6) 115(-7.63,-1) 116(-7.63,-1.4) 117(-7.63,-1.8) 118(-7.63,-2.2) 119(-7.63,-2.6) 120(-7.63,-3) 121(-7.63,-3.4) 122(-7.63,-3.8) 123(-7.63,-4.2) 124(-7.63,-4.6) 125(-7.63,-5) 126(-7.63,-5.4) 127(-7.63,-5.8) 128(-7.63,-6.2)
  silkscreen extent -7.08,-8.76 7.08,7.08
LS-1608 [mil]
  rect 32x32 smd: 1(-30,0) 2(30,0)
  silkscreen extent -55,-25 55,25
LS-2012 [mil]
  rect 55x55 smd: 1(-42.5,0) 2(42.5,0)
  silkscreen extent -80,-40 80,40
QFN-40_5X5 [mm]
  rect 0.2x0.8 smd paste-100 mask+0.05: 1(-1.8,-2.499) 2(-1.4,-2.499) 3(-1,-2.499) 4(-0.6,-2.499) 5(-0.2,-2.499) 6(0.2,-2.499) 7(0.6,-2.499) 8(1,-2.499) 9(1.4,-2.499) 10(1.8,-2.499) 21(1.8,2.499) 22(1.4,2.499) 23(1,2.499) 24(0.6,2.499) 25(0.2,2.499) 26(-0.2,2.499) 27(-0.6,2.499) 28(-1,2.499) 29(-1.4,2.499) 30(-1.8,2.499)
  rect 0.8x0.2 smd paste-100 mask+0.05: 11(2.499,-1.8) 12(2.499,-1.4) 13(2.499,-1) 14(2.499,-0.6) 15(2.499,-0.2) 16(2.499,0.2) 17(2.499,0.6) 18(2.499,1) 19(2.499,1.4) 20(2.499,1.8) 31(-2.499,1.8) 32(-2.499,1.4) 33(-2.499,1) 34(-2.499,0.6) 35(-2.499,0.2) 36(-2.499,-0.2) 37(-2.499,-0.6) 38(-2.499,-1) 39(-2.499,-1.4) 40(-2.499,-1.8)
  rect 3.7x3.7 smd paste-100 mask+0.05: PAD(0,0)
  silkscreen extent -2.7,-2.7 2.7,2.7
RP-4_1005 [mm]
  rect 0.406x0.55 smd: 1(-0.8,0.525) 2(-0.8,-0.525) 7(0.8,0.525) 8(0.8,-0.525)
  rect 0.305x0.55 smd: 3(-0.25,0.525) 4(-0.25,-0.525) 5(0.25,0.525) 6(0.25,-0.525)
  silkscreen extent -1.2,-0.6 1.2,0.6
RS-1005 [mm]
  rect 0.5x0.6 smd: 1(-0.45,0) 2(0.45,0)
  silkscreen extent -0.89,-0.51 0.89,0.51
SOD-106 [mm]
  rrect0% 2x2 smd: 1(-2.2,0) 2(2.2,0)
  silkscreen extent -2.3,-1.45 2.7,1.45
SOP8_W5.0X6.0_P1.27_F0.8 [mil]
  rect 24x71 smd mask+2: 1(75,102.36) 2(25,102.36) 3(-25,102.36) 4(-75,102.36) 5(-75,-102.36) 6(-25,-102.36) 7(25,-102.36) 8(75,-102.36)
  silkscreen extent -110,-51 110,51
SX-32 [mm]
  rect 1.4x1.2 smd: 1(1.1,0.75) 2(-1.1,0.75) 3(-1.1,-0.75) 4(1.1,-0.75)
  silkscreen extent -2,-1.5 2,2
TH_HC-SFP-01L [mm]
  round 1.65 hole 1.05 paste+0 mask+0.05: 1(-7.125,-18.55) 2(-7.125,-8.55) 3(-7.125,1.45) 11(7.125,16.45) 14(7.125,6.45) 16(7.125,-3.55) 17(7.125,-13.55) 18(1.455,-18.55) 19(3.955,1.45) 20(-1.445,1.45)
  round 1.524 hole 0.95 paste+0 mask+0.05: 4(-7.125,4.25) 5(-7.125,8.95) 7(-7.125,13.95) 8(-4.795,18.55) 9(0.005,18.55) 10(4.805,18.55) 12(7.125,13.95) 13(7.125,8.95) 15(7.125,4.25)
  round 1.524 hole 0.85 paste+0 mask+0.05: 6(-7.125,11.45)
  silkscreen extent -8.25,-30.15 7.3,18.55
TO252-5L [mm]
  rect 0.8x2.4 smd: 1(-2.54,-4.2) 2(-1.27,-4.2) 3(0,-4.2) 4(1.27,-4.2) 5(2.54,-4.2)
  rect 5.3x5 smd: 6(0,4.2)
  silkscreen extent -3.35,-4.5 3.35,5.7
TP-SMD(1.0) [mm]
  round 1 smd: 1(0,0)
  silkscreen extent -0.68,-0.68 0.68,0.68
XG1-5611-01 [mm]
  round 1.27 hole 0.8: 1(-3.449,-2.659) 2(-2.437,-4.427) 3(-1.423,-2.63) 4(-0.403,-4.448) 5(0.586,-2.716) 6(1.63,-4.431) 7(2.665,-2.663) 8(3.698,-4.427) 9(-6.747,-9.284) 10(-4.484,-9.284) 11(4.696,-9.253) 12(6.992,-9.284)
  oval 1.6x2.54 hole 1 slot 1.6 at 90 deg: 13(8.218,-3.557) 14(-7.943,-3.557)
  round 3.27 hole 3.27: 15(6.507,-0.051) 16(-6.288,-0.138)
  silkscreen extent -7.83,-9.45 8.02,5.28

## Part data
R3 R6: library part 4.7K

## Via types
v1: diameter 0.5, hole 0.25, Top Layer to Bottom Layer, 313 vias
v2: diameter 2, hole 1.9, Top Layer to Bottom Layer, 4 vias

## Nets (pads, with @x,y where several pads share a name; then routed paths per layer and width w, separated by ;. In a path a pad name is that pad's centre, name@x,y a point inside that pad or via, vN(x,y) a via of type N, cw(c..) or ccw(c..) an arc to the next point about the centre after c; other vN are vias at no path point)
+3.3V: C14.1 C15.1 C16.1 C17.1 C18.1 C25.1 C26.1 C27.1 C28.1 C29.1 C30.1 C31.1 C32.1 C33.1 C34.1 C35.1 C36.1 C37.1 C50.1 C75.1 C76.1 C77.1 FB1.1 FB3.1 J5.10 J5.12 J6.10 J7.10 J8.10 J8.12 L3.1 LD6.1 LD7.1 R1.1 R2.1 R3.1 R4.1 R5.1 R6.1 R7.1 R9.1 R10.1 R11.1 R14.1 R16.1 R17.1 R18.1 R22.2 R23.2 R25.2 R27.2 R80.2 TP1.1 U1.7 U1.14 U1.19 U1.20 U1.21 U1.28 U1.35 U2.8 U3.11 U3.17 U3.21 U3.33 U3.41 U3.42 U3.59 U3.65 U3.66 U3.67 U3.82 U3.90 U3.102 U3.116 U3.128 | length 111.2
  Top Layer w0.2: R2.1@25.908,54.552 25.908,57.785 26.358,58.235 R1.1@27.686,58.235 29.337,58.235 ; R3.1@29.337,54.552 29.337,58.235 ; v1(30.191,43.088) C15.1@31.646,43.088 ; v1(31.242,46.228) C18.1@31.242,47.175 ; R7.1@32.766,54.552 32.766,58.235 ; C16.1@34.925,46.805 v1(34.925,47.498) ; R10.1@36.068,54.552 36.068,58.108 ; v1(38.412,58.235) R9.1@37.719,58.235 32.766,58.235 ; C17.1@38.481,43.161 v1(38.481,43.942) R5.1@39.947,43.942 ; R80.2@46.424,75.565 v1(47.371,75.565) ; L3.1@49.95,69.85 52.578,69.85 53.34,70.612 C75.1@53.34,72.707 ; v1@53.086,67.945 TP1.1@54.864,67.945 ; U2.8@66.1,64.643 v1(66.1,65.338) ; R18.1@69.411,60.833 v1(70.231,60.833) ; R17.1@69.411,62.103 v1(70.231,62.103) ; R16.1@69.411,63.373 v1(69.411,64.389) ; U3.128@70.602,42.441 70.602,42.174 v1(70.739,42.037) ; U3.116@70.602,47.241 72.012,47.241 v1(72.263,46.99) ; U3.102@70.602,52.841 71.492,52.841 v1(72.263,52.07) ; v1(74.432,54.874) U3.90@74.432,56.271 ; v1(75.311,42.926) 76.032,42.205 U3.11@76.032,41.011 ; v1(77.632,54.874) U3.82@77.632,56.271 ; v1(77.851,42.926) 78.432,42.345 78.432,41.865 U3.17@78.432,41.011 ; U3.21@80.032,41.011 80.032,41.865 80.032,42.567 v1(80.391,42.926) ; 83.632,55.499 83.632,55.179 v1(84.032,54.779) ; U3.66@84.032,56.271 v1(84.032,54.779) ; v1(84.328,53.213) 84.7,52.841 U3.59@85.862,52.841 ; U3.65@84.432,56.271 84.432,55.179 v1(84.032,54.779) ; v1(84.455,45.339) 84.757,45.641 U3.41@85.862,45.641 ; v1(84.455,46.609) 84.455,46.594 85.008,46.041 U3.42@85.862,46.041 ; v1(85.862,42.047) U3.33@85.862,42.441 ; LD6.1@87.503,68.31 v1(89.281,68.31) LD7.1@91.186,68.31 92.218,68.31 93.091,67.437 R22.2@93.091,66.363 ; R25.2@94.361,54.102 v1@95.192,54.102 ; R23.2@97.917,66.871 v1(97.917,67.691) ; R27.2@102.108,59.886 v1(103.193,59.886) ; 29.337,58.235 32.766,58.235
  Mid-Layer 1 w0.6: 29.429,43.088 v1(30.191,43.088) ; v1(31.242,46.228) 31.242,46.99 ; 33.182,37.973 v1(33.182,38.735) ; v1(34.925,47.498) 35.687,47.498 ; v1(38.481,43.942) 39.243,43.942 ; 71.501,46.992 v1@72.263,46.992 ; 71.501,52.07 v1(72.263,52.07) ; v1(74.432,54.874) 74.432,55.636 ; 75.311,42.164 v1(75.311,42.926) ; v1(77.632,54.874) 77.632,55.636 ; 77.851,42.164 v1(77.851,42.926) ; 80.391,42.164 v1(80.391,42.926) ; v1(84.032,54.779) 84.032,55.541 ; v1(84.328,53.213) 85.09,53.213 ; v1(84.455,45.339) 85.217,45.339 ; v1(84.455,46.609) 85.217,46.609
  Bottom Layer w0.19: U1.35@36.281,43.888 v1@38.427,43.888
  Bottom Layer w0.2: FB1.1@9.017,52.705 9.017,53.721 ; v1(26.67,43.688) R11.1@27.363,43.688 ; v1(30.191,43.088) U1.14@31.283,43.088 ; U1.20@31.242,45.488 v1(31.242,46.228) U1.21@31.982,46.228 ; U1.19@31.283,45.088 U1.20@31.283,45.488 ; v1@31.283,46.015 v1@31.455,46.187 ; C14.1@33.182,38.042 v1(33.182,38.735) U1.7@33.182,41.189 ; U1.28@34.782,46.187 34.782,47.355 v1(34.925,47.498) ; v1@38.427,43.888 v1(38.481,43.942) ; v1(66.1,65.338) C50.1@66.1,66.038 ; C36.1@70.173,42.037 v1(70.739,42.037) ; v1(72.263,46.99) C35.1@72.956,46.99 ; v1(72.263,52.07) C34.1@72.956,52.07 ; R14.1@72.644,64.458 v1(72.644,65.151) ; C33.1@74.422,54.171 74.432,54.181 v1(74.432,54.874) ; v1@75.311,42.868 v1(75.311,42.926) C28.1@75.311,43.561 ; C32.1@77.632,54.206 v1@77.632,54.899 ; v1(77.851,42.926) C29.1@77.851,43.619 ; v1(80.391,42.926) C30.1@80.391,43.619 ; C37.1@83.762,45.339 v1(84.455,45.339) ; C26.1@83.762,46.609 v1(84.455,46.609) ; C27.1@83.762,53.213 v1(84.328,53.213) ; v1(84.032,54.779) 84.201,54.61 C25.1@85.021,54.61 ; v1(85.862,42.047) C31.1@85.862,42.984
  other v1: 8.509,53.721 9.525,53.721 95.25,54.102 115.57,56.134 116.586,56.134 51.689,67.437 53.213,67.945 51.689,68.453 53.213,68.834 51.689,69.342 53.213,69.85 51.689,70.358 53.213,70.866 51.689,71.247
AGND: C1.2 C2.2 C5.2 C12.2 C13.2 C14.2 C15.2 C16.2 C17.2 C18.2 C19.2 C20.2 C21.2 C22.2 C23.2 C24.2 C25.2 C26.2 C27.2 C28.2 C29.2 C30.2 C31.2 C32.2 C33.2 C34.2 C35.2 C36.2 C37.2 C38.2 C39.2 C40.2 C41.2 C42.2 C43.2 C44.2 C45.2 C46.2 C47.2 C48.2 C49.2 C50.2 C51.2 C52.2 C53.2 C54.2 C55.1 C56.1 C57.1 C58.1 C67.2 C68.2 C69.2 C70.2 C71.2 C72.2 C73.2 C74.2 C75.2 C76.2 C77.2 C78.2 C79.2 C80.2 C81.2 C82.2 CN1.1 CN1.2 CN1.3 CN1.4 CN1.5 CN1.6 CN1.7 CN1.8 CN1.9 CN1.10 CN1.11 CN1.12 CN1.13 CN1.14 CN1.15 CN1.16 CN1.17 CN1.18 CN1.19 CN1.20 CN2.1 CN2.2 CN2.3 CN2.4 CN2.5 CN2.6 CN2.7 CN2.8 CN2.9 CN2.10 CN2.11 CN2.12 CN2.13 CN2.14 CN2.15 CN2.16 CN2.17 CN2.18 CN2.19 CN2.20 J1.9 J1.10 J2.1 J2.9 J2.10 J2.11 J2.14 J2.17 J2.20 J3.9 J3.10 J4.1 J4.9 J4.10 J4.11 J4.14 J4.17 J4.20 J5.13 J5.14 J6.11 J6.13 J6.14 J7.11 J7.13 J7.14 J8.13 J8.14 J9.1 J10.3 J11.2 LD5.2 R8.1 R13.2 R19.2 R24.2 R26.2 R28.2 R29.2 R31.1 R33.1 R35.1 R37.1 R39.1 R41.1 R43.1 R45.1 R81.1 R82.1 RP1.2 RP1.4 RP1.6 RP1.8 RP2.2 RP2.4 RP2.6 RP2.8 RP3.2 RP3.4 RP3.6 RP3.8 U1.16 U1.PAD U2.1 U2.2 U2.3 U2.4 U3.1 U3.12 U3.18 U3.24 U3.32 U3.34 U3.40 U3.43 U3.44 U3.57 U3.61 U3.62 U3.68 U3.85 U3.89 U3.96 U3.99 U3.105 U3.111 U3.115 U3.119 U3.125 U4.3 U4.6 Y1.2 Y1.4 Y2.2 Y2.4 | length 247.2
  Top Layer w0.2: v1(7.283,46.692) J2.20@7.884,46.692 ; J2.1@8.284,38.492 v1@8.284,40.103 ; J2.17@10.284,46.692 v1@10.284,48.006 ; J2.14@12.684,46.692 v1@12.684,47.99 ; J2.9@14.684,38.492 v1(14.684,40.084) ; J2.11@15.128,47.371 v1(15.875,47.371) ; J2.10@15.599,38.608 v1(16.129,38.608) ; v1(20.193,42.36) R35.1@21.082,42.36 ; v1(21.082,38.481) R31.1@21.082,39.312 ; v1(21.913,46.286) R39.1@21.913,46.99 ; R43.1@21.913,51.054 v1(21.913,51.758) ; C67.2@24.765,34.105 v1(24.765,34.925) ; v1(25.654,46.736) C12.2@25.654,47.81 C13.2@27.051,47.81 ; v1(30.157,48.075) C18.2@31.242,48.075 ; U4.6@31.741,74.295 v1(38.227,74.295) U4.3@40.141,74.295 ; C22.2@32.385,44.762 33.216,44.762 v1(33.274,44.704) ; C15.2@32.581,43.053 v1(33.401,43.053) ; C20.2@32.639,41.09 v1(32.639,42.291) ; C19.2@33.909,41.09 v1(33.909,42.418) ; v1(34.544,45.085) 34.925,45.466 C16.2@34.925,45.905 ; v1(34.798,44.45) C23.2@35.618,44.45 ; v1(37.211,38.608) C24.2@37.211,39.936 ; v1(38.227,69.596) C79.2@39.047,69.596 ; v1(38.481,41.529) C17.2@38.481,42.349 ; R13.2@39.37,50.604 39.428,50.546 v1(40.259,50.546) ; C2.2@40.836,46.228 41.529,46.921 v1(41.529,47.244) ; LD5.2@41.021,53.61 v1(42.402,53.61) ; C68.2@44.831,34.105 v1(45.847,34.105) ; R81.1@46.424,76.835 v1(47.371,76.835) ; R82.1@46.424,78.105 v1(47.244,78.105) ; C75.2@53.34,74.867 53.34,76.2 ; C76.2@55.499,73.983 55.499,74.803 ; C77.2@56.896,73.983 56.896,74.803 ; U2.4@60.9,60.833 v1(59.436,60.833) 59.436,62.103 ; U2.3@60.9,62.103 59.436,62.103 ; U2.2@60.9,63.373 59.436,63.373 ; U2.1@60.9,64.643 59.817,64.643 v1(59.436,64.262) 59.436,63.373 ; C71.2@64.897,34.105 v1(64.897,34.925) ; v1(68.961,43.641) U3.125@70.602,43.641 ; v1(68.961,46.041) U3.119@70.602,46.041 ; v1(68.961,49.241) U3.111@70.602,49.241 ; v1(68.961,51.641) U3.105@70.602,51.641 ; v1@69.022,54.041 U3.99@70.602,54.041 ; 69.231,47.641 U3.115@70.602,47.641 ; C49.2@71.051,62.611 v1(71.051,63.627) ; v1(71.384,41.011) U3.1@72.032,41.011 ; v1(71.638,56.271) U3.96@72.032,56.271 ; v1(74.676,57.658) 74.832,57.502 U3.89@74.832,56.271 ; C51.2@74.676,63.061 v1(74.676,63.754) ; v1(76.432,39.265) U3.12@76.432,41.011 ; U3.85@76.432,56.271 76.432,58.398 v1(76.581,58.547) ; Y2.4@76.497,63.742 v1(76.497,64.94) ; v1(78.359,60.96) 78.697,61.298 Y2.2@78.697,62.242 ; v1(78.832,39.624) U3.18@78.832,41.011 ; R19.2@78.936,38.1 v1(79.629,38.1) ; C52.2@80.391,64.585 v1(80.391,65.278) ; v1(81.232,39.322) U3.24@81.232,41.011 ; U3.68@83.232,56.271 v1(83.232,54.309) 83.5,54.041 U3.62@85.471,54.041 ; v1(83.947,34.105) C72.2@84.963,34.105 ; U3.32@84.432,41.011 v1(85.09,41.011) ; U3.34@85.862,42.841 v1(87.418,42.841) ; U3.40@85.862,45.241 v1(87.884,45.241) ; U3.43@85.862,46.441 86.909,46.441 v1(87.376,45.974) ; U3.44@85.862,46.841 87.122,46.841 87.652,46.841 v1(87.884,46.609) ; U3.57@85.862,52.041 86.839,52.041 v1(87.376,52.578) ; U3.61@85.862,53.641 v1@87.169,53.641 ; v1@91.584,45.593 RP1.2@91.584,46.571 RP1.4@91.584,47.121 RP1.6@91.584,47.621 RP1.8@91.584,48.171 RP2.2@91.584,49.238 RP2.4@91.584,49.788 RP2.6@91.584,50.288 RP2.8@91.584,50.838 RP3.2@91.584,51.905 RP3.4@91.584,52.455 RP3.6@91.584,52.955 RP3.8@91.584,53.505 ; C54.2@94.176,59.563 v1(94.996,59.563) ; v1(95.948,56.197) C53.2@95.948,57.531 ; v1(99.51,66.871) R28.2@100.203,66.871 R29.2@104.394,66.871 ; v1(104.521,50.927) R33.1@105.341,50.927 ; v1(104.819,46.692) J4.20@105.674,46.692 ; J4.1@106.045,38.521 v1(106.045,39.878) ; J4.17@108.074,46.692 v1(108.074,48.003) ; R37.1@108.4,50.927 v1(109.22,50.927) R41.1@110.04,50.927 ; J4.14@110.474,46.692 v1(110.474,47.99) ; J4.9@112.474,38.492 v1(112.474,40.386) ; J4.11@112.874,46.692 v1(112.874,48.035) ; R45.1@113.226,50.927 v1(113.919,50.927) ; J4.10@113.274,38.492 v1(113.274,40.015) ; 59.436,62.103 59.436,63.373
  Mid-Layer 2 w0.2: 44.323,10.033 44.323,12.319 45.342,13.338 J6.11@45.342,14.841 ; 64.008,9.525 64.008,13.949 J7.11@64.9,14.841
  Bottom Layer w0.18: U1.16@31.283,43.888 U1.PAD@33.582,43.888
  Bottom Layer w0.2: J1.10@1.397,9.906 4.572,9.906 4.699,10.033 ; J1.9@1.397,12.446 3.717,12.446 4.233,11.93 CN2.1@4.559,11.93 ; v1(10.795,42.672) C55.1@10.795,43.492 ; 11.689,53.345 12.192,53.848 14.905,53.848 15.032,53.721 v1(15.113,53.721) ; v1(12.192,42.672) C56.1@12.192,43.492 ; CN2.13@18.809,39.43 19.758,38.481 v1(21.082,38.481) ; CN2.12@18.809,44.43 18.809,43.744 v1(20.193,42.36) ; CN2.11@18.809,46.93 20.253,46.93 20.897,46.286 v1(21.913,46.286) ; v1(28.321,41.656) C21.2@29.014,41.656 ; v1(31.496,51.181) C5.2@32.316,51.181 ; v1(33.147,36.195) C14.2@33.147,37.084 ; v1(34.671,48.641) Y1.2@34.671,49.88 ; v1(35.629,37.084) R8.1@35.629,38.1 ; Y1.4@36.914,51.169 v1(38.215,51.169) C1.2@38.735,50.649 ; C50.2@66.167,66.998 v1(66.987,66.998) ; v1(68.453,42.037) C36.2@69.273,42.037 ; C43.2@72.517,53.271 C33.2@74.422,53.271 v1(75.115,53.271) ; C46.2@73.856,45.593 v1(74.549,45.593) ; C35.2@73.856,46.99 v1(74.549,46.99) ; C45.2@73.856,48.26 v1(74.549,48.26) ; C44.2@73.856,50.419 v1(74.549,50.419) ; C34.2@73.856,52.07 v1(74.549,52.07) ; C47.2@74.041,44.519 C28.2@75.311,44.519 v1(75.311,45.212) ; C48.2@76.581,44.519 v1(76.581,45.212) ; v1(77.597,52.578) C32.2@77.597,53.271 ; C29.2@77.851,44.519 v1(77.851,45.212) ; C38.2@79.121,44.519 v1(79.121,45.212) ; C30.2@80.391,44.519 v1(80.391,45.212) ; C39.2@81.661,44.519 v1(81.661,45.212) 81.788,45.339 C37.2@82.862,45.339 ; v1(81.661,52.578) C42.2@81.661,53.271 ; v1(82.862,42.995) C40.2@82.862,44.069 ; C26.2@82.862,46.609 v1(82.862,47.302) ; v1(82.862,51.25) C41.2@82.862,51.943 C27.2@82.862,53.213 82.862,53.939 v1(83.232,54.309) ; C31.2@85.852,43.884 86.683,43.884 86.868,44.069 v1(87.418,44.069) ; C25.2@85.921,54.61 v1(85.921,55.949) ; v1(104.521,50.927) 104.521,49.188 CN1.8@104.679,49.03 ; v1(108.585,42.672) C57.1@108.585,43.365 ; v1(109.22,50.927) 109.474,50.927 ; C58.1@109.982,43.365 v1(110.675,43.365) ; v1(113.919,50.927) 113.919,49.748 114.279,49.388 CN1.10@114.279,49.03 ; 117.348,31.369 J3.10@119.253,31.369 ; 117.602,28.829 J3.9@119.253,28.829
  Bottom Layer w0.6: CN2.9@11.689,49.03 11.689,53.345 ; 109.474,50.927 109.475,50.452 ; CN1.9@109.479,49.03 109.475,50.452 ; 109.601,54.229 109.475,54.103 109.475,50.452
  Bottom Layer w1: J5.13@21.246,9.145 19.939,10.452 19.939,14.605 C70.2@22.987,17.653 ; J6.13@41.82,9.145 40.64,10.325 40.64,15.24 C69.2@43.053,17.653 ; J7.13@61.378,9.145 60.071,10.452 60.071,15.875 61.849,17.653 C73.2@63.119,17.653 ; J8.13@81.317,9.145 80.137,10.325 80.137,15.748 82.042,17.653 C74.2@83.185,17.653
  other v1: 44.958,1.905 18.796,31.369 91.186,34.163 35.814,34.671 81.28,35.052 48.895,35.433 70.358,35.433 52.959,35.941 40.513,36.068 29.845,36.576 65.532,36.83 25.654,37.719 38.862,37.846 50.927,38.481 70.231,38.608 65.786,39.878 8.284,40.084 88.392,40.513 95.25,40.513 45.466,41.021 26.289,41.148 43.307,41.148 58.547,42.672 48.895,44.323 52.578,44.577 25.654,44.704 47.117,44.958 91.567,45.593 61.722,45.847 64.77,47.498 52.959,47.625 68.961,47.641 10.287,48.006 12.7,48.006 53.848,50.927 57.15,51.308 53.34,53.213 5.461,53.721 87.376,53.721 68.961,54.041 64.262,55.499 57.785,55.626 85.979,58.039 43.053,58.293 51.562,58.801 16.002,59.055 24.638,59.182 65.532,59.309 111.125,59.436 6.477,61.341 106.045,62.611 40.132,63.5 57.023,63.627 45.466,63.881 51.435,63.881 20.447,64.008 22.479,64.008 28.956,64.008 70.104,66.675 30.861,73.025 32.639,73.025 26.67,74.168 20.955,74.295 22.987,74.295 24.892,74.295 55.499,75.057 56.896,75.057 30.861,75.565 32.639,75.565 53.34,75.946 50.546,76.073 20.955,76.835 22.86,76.835 24.765,76.835 26.67,76.835
AUTOLOAD: LD1.2 R2.2 U1.23 | length 12.5
  Top Layer w0.18: v1(25.908,52.705) R2.2@25.908,53.652 27.644,53.652 LD1.2@27.686,53.61
  Bottom Layer w0.18: v1(25.908,52.705) 27.344,52.705 32.782,47.267 32.782,46.609
DIS_AUTOLOAD: R28.1 U3.76 | length 26.5
  Top Layer w0.2: U3.76@80.032,56.271 80.032,58.488 84.644,63.1 99.041,63.1 100.203,64.262 R28.1@100.203,65.971
EN_PHY: LD3.2 R7.2 U1.25 | length 10.4
  Top Layer w0.18: v1(31.496,50.165) 32.824,51.493 32.824,53.594 33.401,53.594 33.417,53.61 LD3.2@34.417,53.61
  Bottom Layer w0.18: v1(31.496,50.165) 31.496,49.628 33.582,47.542 U1.25@33.582,46.187
EN_PWRLITE: R29.1 U3.73 | length 28.6
  Top Layer w0.2: U3.73@81.232,56.271 81.232,57.59 81.232,57.619 81.232,57.991 85.091,61.85 100.966,61.85 104.394,65.278 R29.1@104.394,65.971
HUB_RST: C49.1 J11.1 R14.2 R15.2 U3.86 | length 46.9
  Top Layer w0.2: C49.1@71.951,62.611 v1(72.644,62.611) ; J11.1@73.533,68.453 73.533,63.5 v1(72.644,62.611) ; U3.86@76.032,56.271 76.032,58.588 72.644,61.976 v1(72.644,62.611)
  Bottom Layer w0.2: R15.2@44.704,55.568 44.704,56.261 51.054,62.611 v1(72.644,62.611) R14.2@72.644,63.558
HUB_XTAL_I: C51.1 U3.84 Y2.1 | length 8.3
  Top Layer w0.2: C51.1@74.676,62.161 76.416,62.161 Y2.1@76.497,62.242 76.962,61.777 76.962,60.833 77.197,60.598 77.197,58.274 76.832,57.909 U3.84@76.832,56.271
HUB_XTAL_O: C52.1 U3.83 Y2.3 | length 10.3
  Top Layer w0.2: U3.83@77.232,56.271 77.232,57.547 77.597,57.912 77.597,63.5 77.839,63.742 Y2.3@78.697,63.742 80.334,63.742 C52.1@80.391,63.685
N01813: R8.2 U1.5 | length 3.4
  Bottom Layer w0.16: U1.5@33.982,41.189 33.982,39.932 34.729,39.185 R8.2@34.729,38.1
N01857: R11.2 U1.15 | length 3.1
  Bottom Layer w0.18: R11.2@28.263,43.688 30.226,43.688 30.426,43.488 U1.15@31.283,43.488
N02024: L1.2 U1.17 U1.18 | length 5.1
  Bottom Layer w0.2: L1.2@29.29,45.386 L1.2@29.29,45.64 L1.2@29.544,45.64 ; 30.388,44.288 U1.17@31.283,44.288 ; 30.496,44.688 U1.18@31.283,44.688
  Bottom Layer w0.4: L1.2@29.29,45.386 30.388,44.288 ; L1.2@29.544,45.64 30.496,44.688
N03411: L3.2 U4.2 | length 7.9
  Top Layer w1: U4.2@40.141,73.025 44.577,73.025 45.3,72.302 L3.2@45.3,69.85
N03467: R80.1 R81.2 U4.4 | length 6.8
  Top Layer w0.2: U4.4@39.887,75.565 U4.4@40.141,75.565 45.397,75.565 45.524,75.692 R81.2@45.524,76.835
N04286: C78.1 C79.1 D1.2 U4.1 | length 8.6
  Top Layer w0.6: D1.2@35.601,66.992 C78.1@40.132,66.992 ; 40.141,67.7 U4.1@40.141,71.755
N04319: C80.1 C81.1 FB2.1 J9.3 | length 12.2
  Top Layer w0.6: J9.3@12.665,66.099 J9.3@14.316,66.099 ; J9.3@14.316,66.226 17.839,66.226 18.542,66.929 FB2.1@24.575,66.929
N04493: R82.2 U4.5 | length 6.3
  Top Layer w0.2: U4.5@39.887,76.835 42.799,76.835 44.069,78.105 R82.2@45.651,78.105
N14471: C67.1 T1.3 T1.4 T1.9 T1.10 | length 17.6
  Top Layer w0.2: T1.10@24.765,30.941 C67.1@24.765,33.205 32.385,33.205 ; T1.9@26.035,30.941 26.035,33.078 ; T1.4@32.385,30.941 32.385,33.205 ; T1.3@33.655,30.941 33.655,32.893 33.343,33.205 32.385,33.205
N14479: R60.2 T1.22 | length 1.9
  Top Layer w0.2: v1(33.655,20.828) T1.22@33.655,21.891
  Bottom Layer w0.2: R60.2@33.655,20.008 v1(33.655,20.828)
N14587: R61.2 T1.21 | length 1.9
  Top Layer w0.2: v1(32.385,20.828) T1.21@32.385,21.891
  Bottom Layer w0.2: R61.2@32.385,20.008 v1(32.385,20.828)
N14665: R62.2 T1.16 | length 1.9
  Top Layer w0.2: v1(26.035,20.828) T1.16@26.035,21.891
  Bottom Layer w0.2: R62.2@26.035,20.008 v1(26.035,20.828)
N14799: R63.2 T1.15 | length 1.9
  Top Layer w0.2: v1(24.765,20.828) T1.15@24.765,21.891
  Bottom Layer w0.2: R63.2@24.765,20.008 v1(24.765,20.828)
N14907: C70.1 R60.1 R61.1 R62.1 R63.1 | length 10.3
  Bottom Layer w0.4: R63.1@24.765,19.108 28.067,19.108 ; C70.1@28.067,17.653 28.067,19.108 ; R60.1@33.655,19.108 28.067,19.108
N15299: C68.1 T2.3 T2.4 T2.9 T2.10 | length 17.6
  Top Layer w0.2: T2.10@44.831,30.941 C68.1@44.831,33.205 46.101,33.205 ; T2.9@46.101,30.941 46.101,33.205 ; T2.4@52.451,30.941 52.451,33.078 ; T2.3@53.721,30.941 53.721,32.766 53.282,33.205 46.101,33.205
N15307: R64.2 T2.22 | length 1.9
  Top Layer w0.2: v1(53.721,20.828) T2.22@53.721,21.891
  Bottom Layer w0.2: R64.2@53.721,20.008 v1(53.721,20.828)
N15415: R65.2 T2.21 | length 1.9
  Top Layer w0.2: v1(52.451,20.828) T2.21@52.451,21.891
  Bottom Layer w0.2: R65.2@52.451,20.008 v1(52.451,20.828)
N15493: R66.2 T2.16 | length 1.9
  Top Layer w0.2: v1(46.101,20.828) T2.16@46.101,21.891
  Bottom Layer w0.2: R66.2@46.101,20.008 v1(46.101,20.828)